# EAGLE board 1Chip-Audio-DAC (EAGLE 8.5.2)
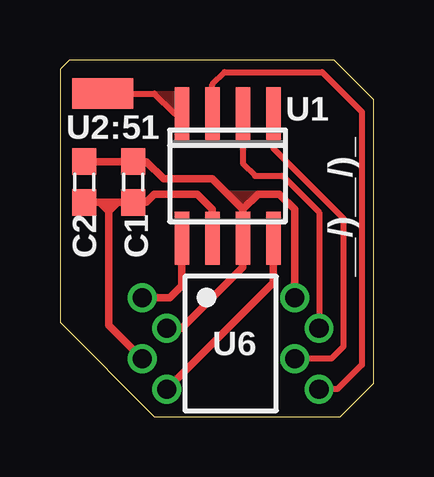
[diagram p0: board, top side]

Size 13.08 x 14.86 mm. Coordinates in mm from the lower left corner, seen from the top.
Outline: 3.94,0 11.68,0 13.08,1.4 13.08,13.21 11.43,14.86 0.38,14.86 0,14.48 0,3.94 3.94,0
Copper layers (1*16): Top 0.0356mm / dielectric 1.5011mm / Bottom 0.0356mm
Design rules "LaenPCBOrder": minimum track width 6mil, minimum drill 13mil, track to track 6mil, track to pad 6mil, pad to pad 6mil, via to via 6mil, smd to smd 6mil, copper to edge 15mil, drill to drill 6mil, minimum pad ring 7mil, minimum via ring 7mil, stop-mask expansion 3mil, vias tented up to drill 30mil, thermal gap 10mil

## Footprints (pad centres in the part's own frame; a part is rotated, then mirrored left to right if it is on the bottom)
C0603 = smd 1.1 x 1: 1 -0.85,0; 2 0.85,0
SMD1,27-2,54 = smd 1.27 x 2.54: 1 0,0
SO-08 = smd 0.6 x 2.2: 1 -1.905,-2.6; 2 -0.635,-2.6; 3 0.635,-2.6; 4 1.905,-2.6; 5 1.905,2.6; 6 0.635,2.6; 7 -0.635,2.6; 8 -1.905,2.6

## Placement (x,y rotation side)
C1  0.1u  [C0603]  3.05,9.78 90 top
C2  1u  [C0603]  1.02,9.78 90 top
MCLK  [SMD1,27-2,54]  1.78,13.46 90 top
U1  CS4338-KSZ  [SO-08]  6.98,10.03 180 top

## Library data of the parts
C1 C2 = rcl
MCLK = wirepad
U1 = ref-packages

## Nets
AGND: C1.1 C2.1 U1.6
AOUTL: U1.8
AOUTR: U1.5
LRCK: U1.3
MCLK: MCLK.1 U1.4
SCLK: U1.2
SDATA: U1.1
VA: C1.2 C2.2 U1.7

## Tracks (layer width: path | path; a pad name or v marks a point on that pad's centre or on a via)
AGND  (via drill 0.8)
  Top 0.305: C2.1 1.65,8.93 | 1.65,8.93 1.78,8.93 | 1.78,8.93 2.41,8.93 | 2.41,8.93 C1.1 | U1.6 6.35,8.64 5.71,9.27 3.94,9.27 3.59,8.93 C1.1 | C1.1 2.71,8.93 | 1.65,8.93 2.03,8.55 | 2.03,8.55 2.03,3.81 v3.43,2.41 | 2.03,8.55 2.41,8.93 | 1.78,8.93 2.03,8.68 2.03,8.55
AOUTL  (via drill 0.8)
  Top 0.305: U1.8 8.89,6.86 8.89,5.97 8.89,5.59 v4.45,1.14
AOUTR  (via drill 0.8)
  Top 0.305: v3.43,4.95 4.57,4.95 5.08,5.46 U1.5
LRCK  (via drill 0.8)
  Top 0.254: U1.3 6.35,13.84 6.86,14.35 10.92,14.35 12.57,12.7 12.57,2.16 11.56,1.14 v10.79,1.14
MCLK
  Top 0.254: MCLK.1 3.94,13.46 4.77,12.63 U1.4
  pour Top (no thermals): 3.94,13.46 5.08,13.46 5.08,12.7 4.7,12.7
SCLK  (via drill 0.8)
  Top 0.254: U1.2 7.62,10.54 8.13,10.03 9.27,10.03 10.79,8.51 v10.79,3.68
SDATA  (via drill 0.8)
  Top 0.254: U1.1 8.89,11.18 11.81,8.25 11.81,2.92 11.3,2.41 v9.78,2.41
VA  (via drill 0.8)
  Top 0.305: 7.62,8.64 U1.7 7.62,6.22 5.08,3.68 v4.45,3.68 | 7.62,8.64 8.25,9.27 9.14,9.27 9.78,8.64 v9.78,4.95 | C2.2 C1.2 3.59,10.63 4.32,9.91 6.35,9.91 7.62,8.64
  pour Top (no thermals): 8.25,9.27 6.98,9.27 7.62,8.64

## Text on the board
tNames: U2:51 | U1 | C2 | C1 | __/)__/)_ | U6
bNames: 1Chip-SNES Aud. / DAC Replacement | CS4338-KSZ / 0.1uF / 25V+ / 1uF /25V+ | U1: / C1: / C2:
tDocu: (c) 2018 Peter Bartmann / aka borti4938